# EAGLE board 2nd_schEematic (EAGLE 9.6.2)
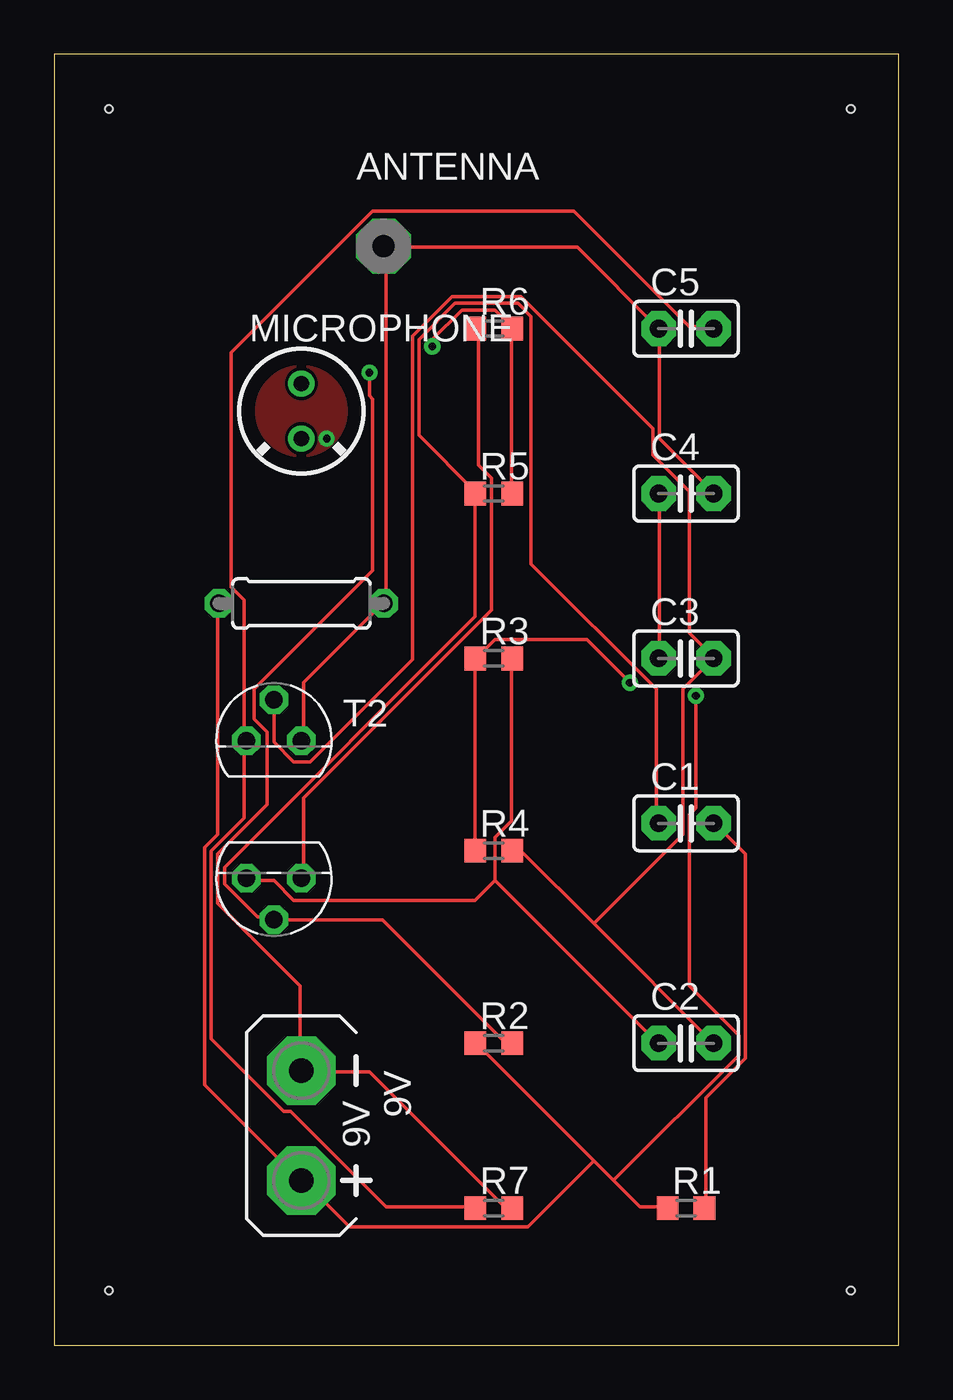
[diagram p0: board, top side]
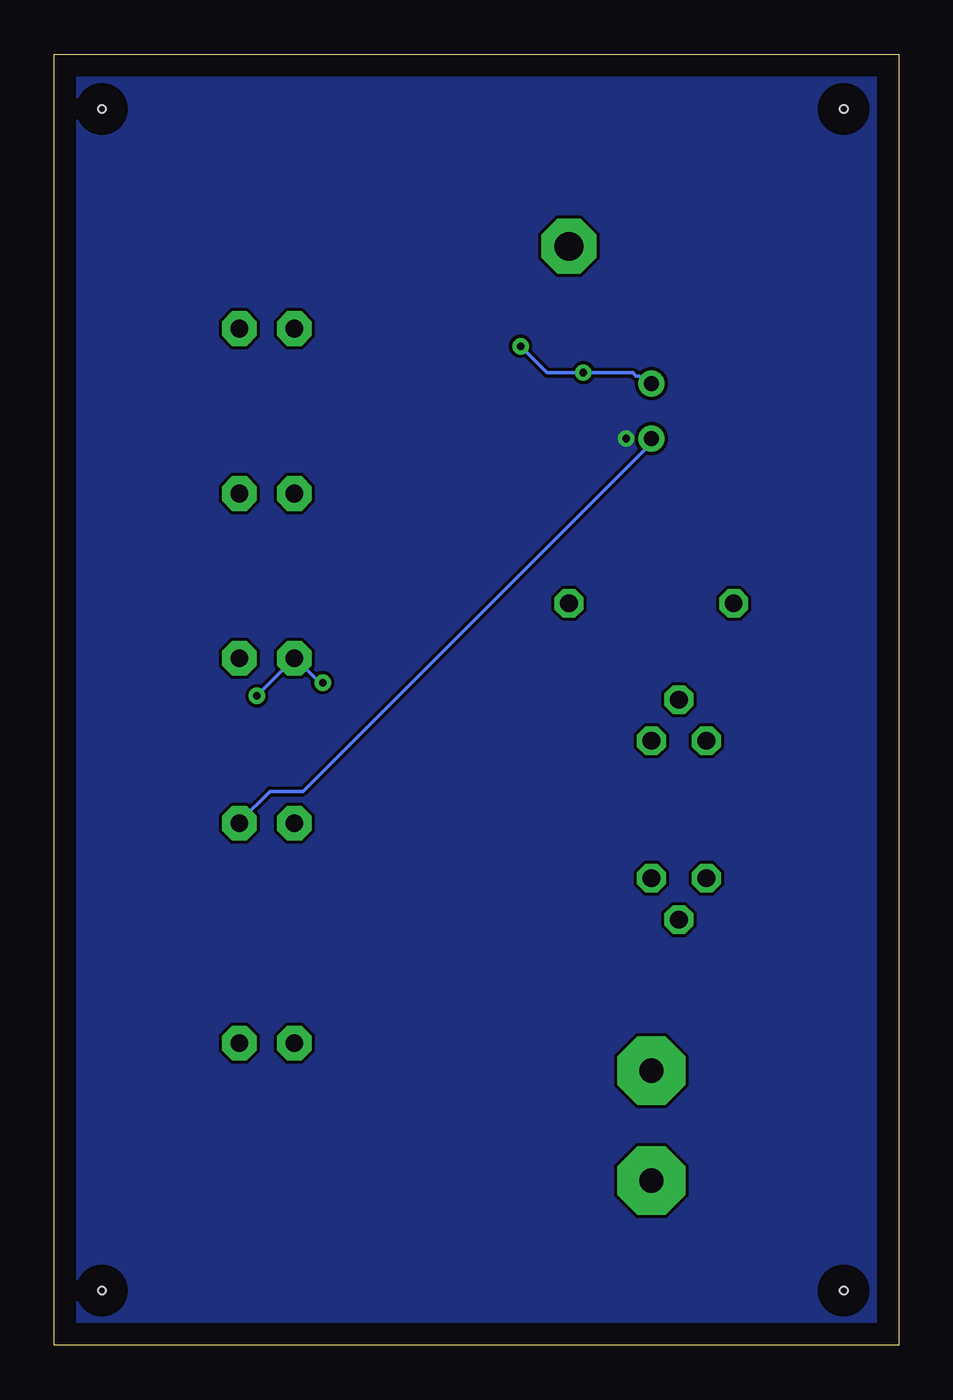
[diagram p1: board, bottom side, seen from below]

Size 39.04 x 59.68 mm. Coordinates in mm from the lower left corner, seen from the top.
Outline: 0,0 39.04,0 39.04,59.68 0,59.68 0,0
Copper layers (1*16): Top 0.035mm / dielectric 1.5mm / Bottom 0.035mm
Design rules "default": minimum track width 6mil, minimum drill 0.35mm, track to track 6mil, track to pad 6mil, pad to pad 6mil, via to via 6mil, smd to smd 6mil, copper to edge 40mil, drill to drill 6mil, minimum pad ring 10mil, minimum via ring 8mil, stop-mask expansion 4mil, vias tented up to drill 0mil, thermal gap 10mil
Holes 0.35 mm at 2.54,57.15 36.83,57.15 2.54,2.54 36.83,2.54

## Footprints (pad centres in the part's own frame; a part is rotated, then mirrored left to right if it is on the bottom)
AB9V = drill 1.118 pad 3.15 octagon: + 0,2.54; - 0,-2.54
PAD-01 = drill 1.321 pad 2.54 octagon: 1 0,0
C2.5-2 = drill 0.813 pad 1.6 octagon: 1 -1.27,0; 2 1.27,0
0207/7 = drill 0.813 octagon: 1 -3.81,0; 2 3.81,0
F6050AP = drill 0.7 pad 1.2: 1 0,1.27; 2 0,-1.27
R0603 = smd 1 x 1.1: 1 -0.85,0; 2 0.85,0
TO92 = drill 0.813 octagon: 1 1.27,0; 2 0,1.905; 3 -1.27,0

## Placement (x,y rotation side)
9V  AB9V  [AB9V]  11.43,10.16 180 top
ANTENNA  10"  [PAD-01]  15.24,50.8 0 top
C1  0.1uF  [C2.5-2]  29.21,24.13 0 top
C2  0.1uF  [C2.5-2]  29.21,13.97 0 top
C3  0.01uF  [C2.5-2]  29.21,31.75 0 top
C4  20pF  [C2.5-2]  29.21,39.37 0 top
C5  4.7pF  [C2.5-2]  29.21,46.99 0 top
L1  0.1uH  [0207/7]  11.43,34.29 0 top
MICROPHONE  ELECTRET_MICROPHON-F6050AP  [F6050AP]  11.43,43.18 0 top
R1  10K  [R0603]  29.21,6.35 0 top
R2  1M  [R0603]  20.32,13.97 0 top
R3  10K  [R0603]  20.32,31.75 0 top
R4  10K  [R0603]  20.32,22.86 0 top
R5  100K  [R0603]  20.32,39.37 0 top
R6  100  [R0603]  20.32,46.99 0 top
R7  1K  [R0603]  20.32,6.35 0 top
T1  2N3904  [TO92]  10.16,21.59 180 top
T2  2N3904  [TO92]  10.16,27.94 0 top

## Library data of the parts
9V = battery
ANTENNA = discrete
C1-C5 = capacitor-wima
L1 = rcl; SPICEPREFIX: L
MICROPHONE = microphon
R1-R7 = rcl; SPICEPREFIX: R
T1 T2 = transistor

## Nets
0: 9V.- MICROPHONE.1 R5.2 R6.2 R7.2
N$1: C1.1 R2.2 R5.1 T1.2
N$2: R6.1 T1.3
N$3: C2.1 R3.2 T1.1
N$4: 9V.+ C3.1 C4.1 L1.1 R1.1 R2.1 R3.1 R4.1
N$5: C1.2 MICROPHONE.2 R1.2
N$7: C5.2 R7.1 T2.3
N$8: C2.2 C3.2 R4.2 T2.2
N$9: ANTENNA.1 C4.2 C5.1 L1.2 T2.1

## Tracks (layer width: path | path; a pad name or v marks a point on that pad's centre or on a via)
0  (via drill 0.35)
  Top 0.152: R5.2 21.13,39.47 21.13,46.94 R6.2 21.13,47.09 20.37,47.85 18.85,47.85 17.48,46.48 v17.48,46.18 | R7.2 21.13,6.4 20.83,6.4 14.58,12.65 11.53,12.65 9V.- 11.38,12.8 11.38,16.61 7.57,20.42 7.57,22.71 9.86,24.99 9.86,28.35 9.25,28.96 9.25,30.33 14.73,35.81 14.73,43.74 14.58,43.89 v14.58,44.96
  Bottom 0.152: v17.48,46.18 16.26,44.96 v14.58,44.96 12.29,44.96 12.14,44.81 11.99,44.81 11.68,44.5 11.53,44.5 MICROPHONE.1
GND  (via drill 0.35)
  other vias: 12.6,41.91
  pour Top: -1.27,60.96 -1.27,-1.27 40.64,-1.27 40.64,60.96
  pour Bottom: -2.54,62.23 -2.54,-2.54 41.91,-2.54 41.91,62.23
N$1
  Top 0.152: R2.2 21.13,14.02 20.83,14.02 15.19,19.66 10.16,19.66 T1.2 10.16,19.81 9.4,19.81 7.87,21.34 7.87,22.1 19.46,33.68 19.46,39.32 R5.1 19.46,39.47 16.87,42.06 16.87,46.48 18.54,48.16 21.44,48.16 22.05,47.55 22.05,36.12 27.84,30.33 27.84,24.23 C1.1
N$2
  Top 0.152: R6.1 19.61,46.94 19.61,40.69 20.22,40.08 20.22,33.98 11.53,25.3 11.53,21.64 T1.3
N$3
  Top 0.152: 20.37,21.49 20.37,23.47 21.13,24.23 21.13,31.7 R3.2 | 20.37,21.49 27.84,14.02 C2.1 | 20.37,21.49 19.46,20.57 11.07,20.57 10.16,21.49 8.94,21.49 T1.1
N$4  (via drill 0.35)
  Top 0.152: R4.1 19.46,22.86 19.46,31.7 R3.1 19.61,31.85 20.37,32.61 24.64,32.61 v26.62,30.63 | C3.1 27.99,31.85 27.99,39.32 C4.1 | 24.94,8.53 19.61,13.87 R2.1 | 24.94,8.53 25.86,7.62 | 25.86,7.62 27.08,6.4 28.3,6.4 R1.1 | L1.1 7.57,34.29 7.57,23.62 6.96,23.01 6.96,12.04 11.38,7.62 9V.+ 11.53,7.62 13.67,5.49 21.89,5.49 24.94,8.53 | v29.67,30.02 29.67,24.84 29.36,24.54 29.36,16.61 31.65,14.33 31.65,13.41 25.86,7.62
  Bottom 0.152: v26.62,30.63 26.77,30.63 27.84,31.7 C3.1 v29.67,30.02
N$5
  Top 0.152: R1.2 30.12,6.4 30.12,11.43 31.95,13.26 31.95,22.71 30.58,24.08 C1.2
  Bottom 0.152: MICROPHONE.2 11.53,41.91 11.53,41.6 27.53,25.6 29.06,25.6 30.43,24.23 C1.2
N$7
  Top 0.152: R7.1 19.46,6.4 15.34,6.4 10.92,10.82 10.62,10.82 7.26,14.17 7.26,22.86 8.79,24.38 8.79,27.89 T2.3 8.79,28.04 8.79,34.44 8.18,35.05 8.18,45.87 14.73,52.43 24.03,52.43 29.36,47.09 30.43,47.09 C5.2
N$8
  Top 0.152: R4.2 21.59,22.86 24.94,19.51 | C2.2 24.94,19.51 | T2.2 10.16,27.89 11.07,26.98 11.84,26.98 16.56,31.7 16.56,46.63 18.39,48.46 21.59,48.46 27.69,42.37 27.69,41.15 29.36,39.47 29.36,32.92 30.43,31.85 C3.2 29.06,30.33 29.06,23.62 24.94,19.51
N$9
  Top 0.152: T2.1 11.53,28.04 11.53,30.63 15.19,34.29 L1.2 15.34,34.29 15.34,50.75 | C4.2 30.43,39.47 27.99,41.91 27.99,46.94 C5.1 24.18,50.75 15.34,50.75 | 15.34,50.75 ANTENNA.1